# Altium PCB PCB_Testplatine - GND mit Tracks.PcbDoc (part 3 of 4)
Units mm, origin at the board's own origin, x right, y up, seen from the top; angles counter-clockwise.
Board outline 124.77 x 137.35 mm, 2 copper layers (Top Layer, Bottom Layer); 214 components, 181 nets, 1100 pads, 464 vias.
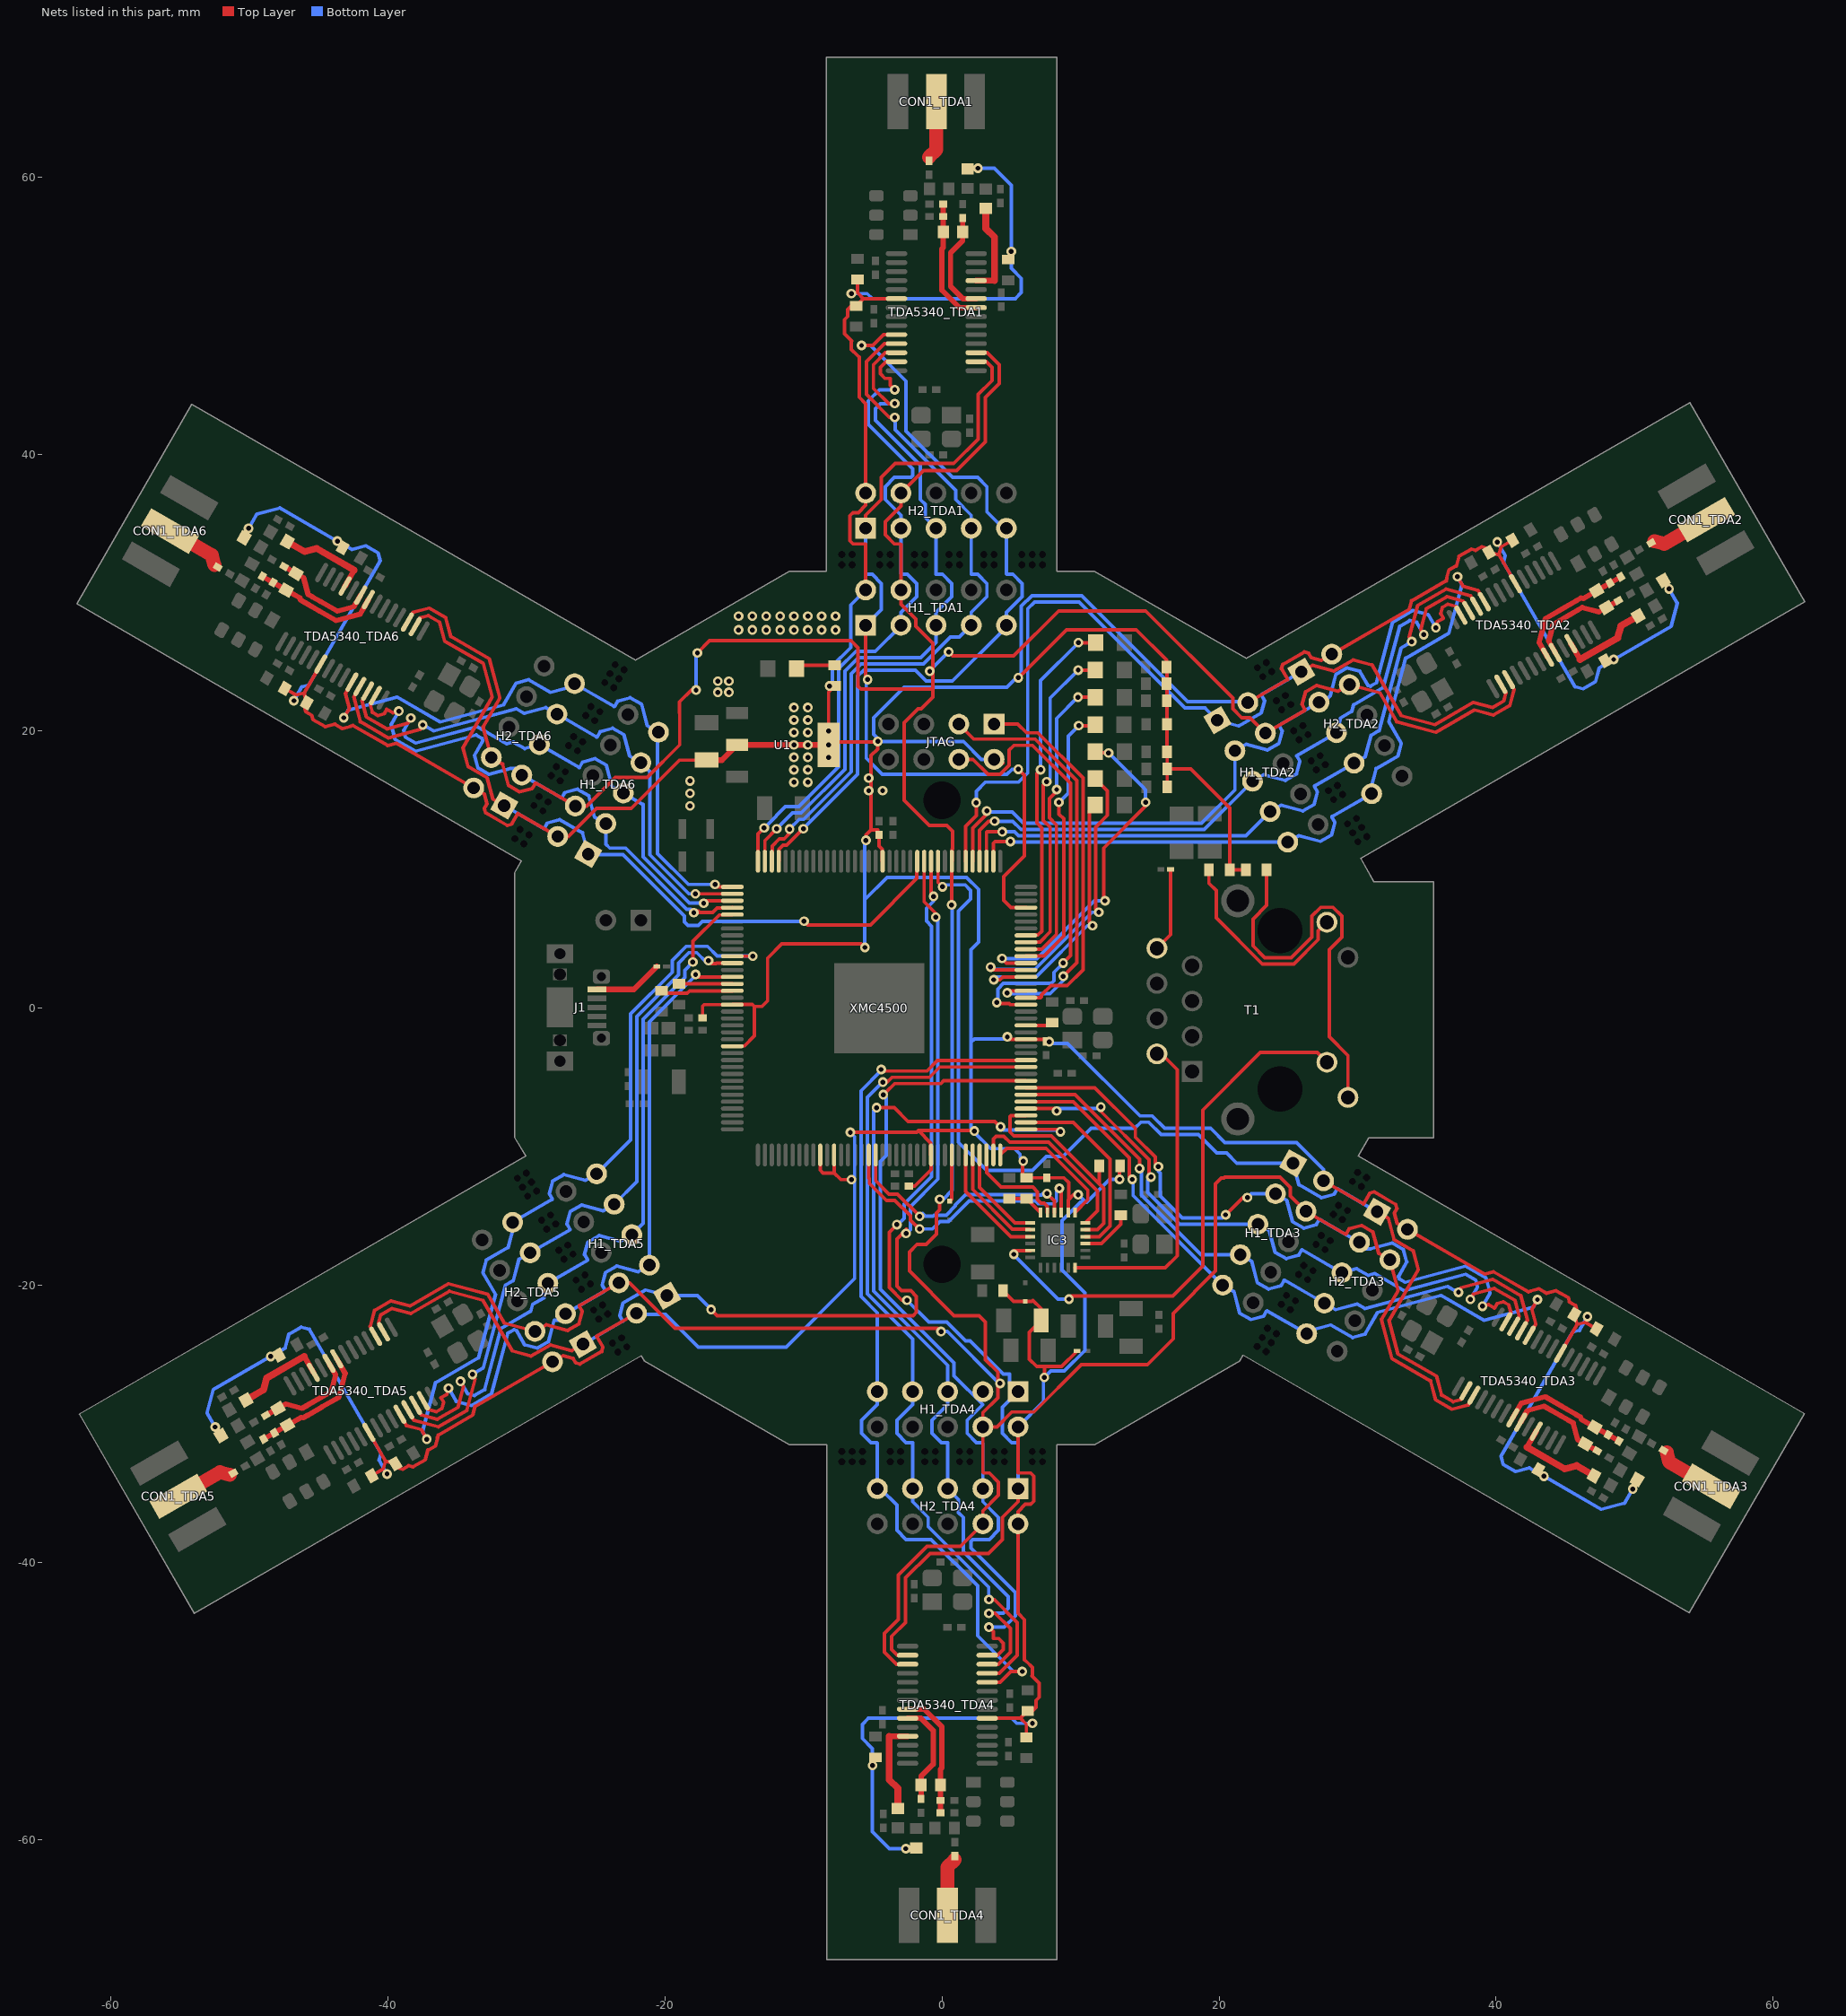
[diagram p3: the nets of this part, all layers, seen from the top]

## Via types
v1: diameter 0.7, hole 0.35, Top Layer to Bottom Layer, 410 vias
v2: diameter 0.5, hole 0.2, Top Layer to Bottom Layer, 36 vias
v3: diameter 2.7, hole 2.5, Top Layer to Bottom Layer, 12 vias
v4: diameter 1.27, hole 0.711, Top Layer to Bottom Layer, 6 vias

## Nets (pads, with @x,y where several pads share a name; then routed paths per layer and width w, separated by ;. In a path a pad name is that pad's centre, name@x,y a point inside that pad or via, vN(x,y) a via of type N, cw(c..) or ccw(c..) an arc to the next point about the centre after c; other vN are vias at no path point) (continued)
NetIC3_6: IC3.6 T1.2 | length 23.1
  Top Layer w0.254: IC3.6@9.6,-18.75 16.112,-18.75 16.977,-17.885 16.977,-5.459 16.973,-5.455 16.973,-4.443 15.83,-3.3 T1.2@15.51,-3.3
NetIC3_9: IC3.9 R205.2 | length 3.8
  Top Layer w0.254: IC3.9@10.35,-17 11.496,-17 12.9,-15.595 R205.2@12.9,-14.95
NetIC3_10: IC3.10 XMC4500.74 | length 14.1
  Top Layer w0.254: XMC4500.74@6.05,-8.25 9.462,-8.25 12.123,-10.911 12.123,-15.73 11.353,-16.5 IC3.10@10.35,-16.5
NetIC3_11: IC3.11 R204.1 XMC4500.75 | length 16.1
  Top Layer w0.254: XMC4500.75@6.05,-7.75 6.027,-7.773 4.96,-7.773 4.898,-7.835 4.898,-8.948 5.177,-9.227 7.881,-9.227 11.35,-12.696 ; IC3.11@10.35,-16 11.211,-16 11.669,-15.542 11.669,-13.015 11.35,-12.696 ; R204.1@11.35,-11.4 11.35,-12.696
NetIC3_12: IC3.12 XMC4500.71 | length 13
  Top Layer w0.254: XMC4500.71@3.7,-10.6 3.7,-9.45 3.9,-9.25 4.45,-9.25 4.881,-9.681 7.693,-9.681 11.215,-13.203 11.215,-14.635 IC3.12@10.35,-15.5
NetIC3_13: IC3.13 XMC4500.72 | length 9.7
  Top Layer w0.254: XMC4500.72@4.2,-10.6 4.665,-10.135 7.505,-10.135 10.52,-13.15 10.52,-13.83 IC3.13@9.6,-14.75
NetIC3_15: IC3.15 XMC4500.53 | length 21.1
  Top Layer w0.254: XMC4500.53@-5.3,-10.6 -5.3,-12.26 -5.254,-12.306 -5.254,-12.65 -4.023,-13.881 -3.411,-13.881 -2.297,-14.995 -2.297,-15.31 -1.9,-15.707 -1.853,-15.707 v1(-1.62,-15.94) v1@-1.55,-15.94 ; v1(8.46,-13.01) 8.438,-13.01 8.378,-13.07 8.6,-13.292 IC3.15@8.6,-14.75
  Bottom Layer w0.254: v1(-1.62,-15.94) -0.711,-15.94 -0.166,-15.395 0.477,-15.395 1.941,-13.93 6.739,-13.93 6.937,-14.128 8.027,-14.128 8.25,-13.905 8.25,-13.22 v1(8.46,-13.01)
NetIC3_16: IC3.16 XMC4500.54 | length 17.8
  Top Layer w0.254: XMC4500.54@-4.8,-10.6 -4.8,-12.462 -3.835,-13.427 -3.223,-13.427 v1(-1.62,-15.03) ; v1(7.573,-13.396) 8.1,-13.923 IC3.16@8.1,-14.75
  Bottom Layer w0.254: v1(-1.62,-15.03) -1.419,-14.829 -1.22,-15.027 -0.66,-15.027 -0.574,-14.941 0.288,-14.941 0.951,-14.278 0.951,-14.215 1.69,-13.476 6.927,-13.476 6.934,-13.483 7.171,-13.483 7.258,-13.396 v1(7.573,-13.396)
NetIC3_17: IC3.17 XMC4500.70 | length 7.4
  Top Layer w0.254: XMC4500.70@3.223,-10.623 3.223,-11.885 4.265,-12.927 6.539,-12.927 6.877,-13.265 6.877,-13.807 7.143,-14.073 7.36,-14.073 7.6,-14.313 IC3.17@7.6,-14.75
NetIC3_18: IC3.18 R203.1 R206.1 | length 2.7
  Top Layer w0.254: R206.1@4.85,-13.75 R203.1@6.1,-13.75 IC3.18@7.1,-14.75
NetIC3_19: IC3.19 XMC4500.69 | length 7.1
  Top Layer w0.254: XMC4500.69@2.7,-10.6 2.7,-12.95 5.25,-15.5 IC3.19@6.35,-15.5
NetIC3_20: IC3.20 XMC4500.68 | length 7.8
  Top Layer w0.254: XMC4500.68@2.2,-10.6 2.2,-13.092 5.062,-15.954 6.304,-15.954 IC3.20@6.35,-16
NetIC3_21: IC3.21 XMC4500.67 | length 8.6
  Top Layer w0.254: XMC4500.67@1.7,-10.6 1.7,-13.234 4.966,-16.5 IC3.21@6.35,-16.5
NetIC3_23: IC3.23 T1.10 | length 39.8
  Top Layer w0.254: v1(5.18,-17.77) 5.18,-17.53 5.15,-17.5 IC3.23@6.35,-17.5 ; v1(9.163,-21.012) 9.163,-20.963 9.338,-20.789 16.642,-20.789 18.83,-18.601 18.83,-7.36 22.98,-3.21 27.08,-3.21 T1.10@27.78,-3.91
  Bottom Layer w0.254: v1(5.18,-17.77) 5.18,-17.83 8.362,-21.012 v1(9.163,-21.012) ; T1.10@27.78,-3.91 T1.10@27.78,-3.888
NetJ1_1: J1.1 L11.2 | length 5
  Top Layer w0.4: J1.1@-24.925,1.35 -22.25,1.35 L11.2@-20.6,3
NetJTAG_4: JTAG.4 XMC4500.91 | length 33.4
  Top Layer w0.254: JTAG.4@1.21,17.96 2.227,17.96 3.304,16.883 4.196,16.883 4.827,17.514 4.827,18.615 5.181,18.969 6.531,18.969 9.265,16.235 9.265,3.799 8.743,3.277 v1(8.743,3.25) ; v1(3.95,0.4) 4.023,0.327 4.83,0.327 4.907,0.25 XMC4500.91@6.05,0.25
  Bottom Layer w0.254: v1(3.95,0.4) 4.023,0.473 4.023,1.38 4.42,1.777 7.885,1.777 8.073,1.965 8.073,2.58 v1(8.743,3.25)
NetL3_TDA1_1: L3_TDA1.1 TDA5340_TDA1.25 | length 6.8
  Top Layer w0.4: TDA5340_TDA1.25@2.455,52.515 3.78,52.515
  Top Layer w0.5: L3_TDA1.1@3.15,57.73 3.15,56.28 3.78,55.65 3.78,52.515
NetL3_TDA2_1: L3_TDA2.1 TDA5340_TDA2.25 | length 6.8
  Top Layer w0.4: TDA5340_TDA2.25@45.4,26.31 46.063,25.162
  Top Layer w0.5: 46.063,25.162 48.778,26.73 49.008,27.59 L3_TDA2.1@50.264,28.315
NetL3_TDA3_1: L3_TDA3.1 TDA5340_TDA3.25 | length 6.8
  Top Layer w0.4: 42.232,-31.693 TDA5340_TDA3.25@42.895,-30.545
  Top Layer w0.5: 42.232,-31.693 44.947,-33.26 45.808,-33.03 L3_TDA3.1@47.064,-33.755
NetL3_TDA4_1: L3_TDA4.1 TDA5340_TDA4.25 | length 6.8
  Top Layer w0.4: -3.82,-52.565 TDA5340_TDA4.25@-2.495,-52.565
  Top Layer w0.5: -3.82,-52.565 -3.82,-55.7 -3.19,-56.33 L3_TDA4.1@-3.19,-57.78
NetL3_TDA5_1: L3_TDA5.1 TDA5340_TDA5.25 | length 6.8
  Top Layer w0.4: -46.062,-25.143 TDA5340_TDA5.25@-45.4,-26.291
  Top Layer w0.5: L3_TDA5.1@-50.264,-28.297 -49.008,-27.572 -48.777,-26.711 -46.062,-25.143
NetL3_TDA6_1: L3_TDA6.1 TDA5340_TDA6.25 | length 6.8
  Top Layer w0.4: TDA5340_TDA6.25@-43.115,30.465 -42.452,31.613
  Top Layer w0.5: L3_TDA6.1@-47.284,33.675 -46.028,32.95 -45.167,33.18 -42.452,31.613
NetL201_2: L201.2 T1.8 | length 6.3
  Top Layer w0.254: T1.8@15.65,4.46 T1.8@15.51,4.32 16.49,5.3 L201.2@16.49,10.01
NetPower_1: Power.1 R11.1 | length 2.9
  Top Layer w0.254: Power.1@-10.51,24.51 -10.27,24.75 R11.1@-7.75,24.75
NetR10_1: R10.1 XMC4500.88 | length 2
  Top Layer w0.254: XMC4500.88@6.05,-1.25 7.75,-1.25 R10.1@7.95,-1.05
NetR12_1: R12.1 XMC4500.15 | length 3.9
  Top Layer w0.254: R12.1@-19,1.75 XMC4500.15@-15.15,1.75
NetR13_1: R13.1 XMC4500.16 | length 5.4
  Top Layer w0.254: R13.1@-20.25,1.25 -20.25,1.073 -18.415,1.073 -18.238,1.25 XMC4500.16@-15.15,1.25
NetR200_1: R200.1 T1.9 | length 29.4
  Top Layer w0.254: R200.1@23.43,9.99 23.43,7.41 22.448,6.428 22.448,4.492 23.302,3.638 25.209,3.638 26.703,5.132 26.703,6.646 27.334,7.277 28.226,7.277 28.857,6.646 28.857,5.123 27.95,4.216 27.95,-2.075 29.3,-3.425 T1.9@29.3,-6.45
NetR201_1: R201.1 T1.12 | length 14.7
  Top Layer w0.254: R201.1@19.26,9.99 19.26,9.011 19.79,8.481 19.79,6.508 23.114,3.184 25.397,3.184 27.157,4.944 27.157,5.577 T1.12@27.78,6.2
P_ON1: H1_TDA1.3 H2_TDA1.3 TDA5340_TDA1.13 XMC4500.144 | length 49.3
  Top Layer w0.254: XMC4500.144@-13.3,10.6 -13.3,12.56 v1(-12.85,13.01) ; v1(-3.42,44.64) -3.739,44.959 -3.739,45.459 -4.125,45.459 -4.451,45.785 -4.451,46.245 -4.031,46.665 TDA5340_TDA1.13@-3.295,46.665
  Bottom Layer w0.254: v1(-12.85,13.01) -12.674,13.01 -12.624,13.06 -12.624,13.23 -11.32,14.535 -10.361,14.535 -7.462,17.434 -7.462,24.522 -6.225,25.759 -4.831,25.759 -2.98,27.61 -2.98,28.581 -1.849,29.712 -1.849,30.648 -2.512,31.311 -2.891,31.311 -2.98,31.4 H2_TDA1.3@-2.98,34.64 -2.98,35.581 -4.111,36.712 -4.111,37.648 -3.448,38.311 -2.249,38.311 -2.12,38.44 -2.12,38.94 -5.32,42.14 -5.32,43.84 -4.52,44.64 v1@-3.42,44.64
P_ON2: H1_TDA2.3 H2_TDA2.3 TDA5340_TDA2.13 XMC4500.113 | length 52.8
  Top Layer w0.254: XMC4500.113@2.177,10.623 XMC4500.113@2.2,10.6 2.2,12.99 3.22,14.01 v1(3.22,14.23) ; v1(35.643,27.46) 35.759,27.896 36.193,28.146 35.999,28.48 36.119,28.925 36.517,29.156 37.091,29.002 TDA5340_TDA2.13@37.459,28.364
  Bottom Layer w0.254: v1(3.22,14.23) 3.283,14.167 5.057,14.167 5.882,13.342 18.731,13.342 21.14,15.751 H1_TDA2.3@21.14,18.579 21.955,19.049 23.5,18.635 24.311,19.104 24.554,20.009 24.364,20.338 24.397,20.459 H2_TDA2.3@27.202,22.079 27.547,22.079 28.017,22.549 28.431,24.094 29.242,24.563 30.147,24.32 30.747,23.282 30.923,23.234 31.356,23.484 32.528,27.856 34,28.706 35.093,28.413 v1(35.643,27.46)
P_ON3: H1_TDA3.3 H2_TDA3.3 TDA5340_TDA3.13 XMC4500.79 | length 51
  Top Layer w0.254: XMC4500.79@6.05,-5.75 11.027,-5.75 13.953,-8.676 13.953,-9.314 15.381,-10.742 15.381,-11.211 v1(15.61,-11.44) ; v1(20.47,-14.92) 21.71,-13.68 v1(22.04,-13.68) ; v1(39.012,-21.52) 39.448,-21.403 39.881,-21.653 40.074,-21.319 40.519,-21.199 40.918,-21.43 41.072,-22.003 TDA5340_TDA3.13@40.704,-22.641
  Bottom Layer w0.254: v1(15.61,-11.44) 15.61,-11.775 15.751,-11.916 15.751,-13.565 17.333,-15.147 20.243,-15.147 v1(20.47,-14.92) ; v1(22.04,-13.68) 22.319,-13.401 H1_TDA3.3@24.07,-13.401 24.885,-13.871 25.298,-15.416 26.11,-15.885 27.015,-15.642 27.205,-15.313 27.326,-15.281 H2_TDA3.3@30.132,-16.901 30.602,-17.371 30.947,-17.371 32.492,-16.957 33.303,-17.426 33.546,-18.331 32.946,-19.369 32.993,-19.546 33.426,-19.796 37.797,-18.624 39.27,-19.474 39.562,-20.567 v1(39.012,-21.52)
P_ON4: H1_TDA4.3 H2_TDA4.3 TDA5340_TDA4.13 XMC4500.80 | length 62
  Top Layer w0.254: v1(-4.25,-6.25) -4.017,-6.017 -4,-6.017 -3.433,-5.45 -0.084,-5.45 0.116,-5.25 XMC4500.80@6.05,-5.25 ; TDA5340_TDA4.13@3.255,-46.715 3.991,-46.715 4.411,-46.295 4.411,-45.835 4.085,-45.509 3.699,-45.509 3.699,-45.009 v1(3.38,-44.69)
  Bottom Layer w0.254: v1(-4.25,-6.25) -4.04,-6.46 -4.04,-7.983 -4.047,-7.99 -4.047,-8.55 -4.04,-8.557 -4.04,-10.646 -4.45,-11.056 -4.45,-20.3 0.85,-25.6 0.85,-26.541 2.94,-28.631 1.809,-29.762 1.809,-30.698 2.472,-31.361 2.851,-31.361 2.94,-31.45 2.94,-35.631 4.071,-36.762 4.071,-37.698 3.408,-38.361 2.209,-38.361 2.08,-38.49 2.08,-38.99 5.28,-42.19 5.28,-43.89 4.48,-44.69 v1(3.38,-44.69)
P_ON5: H1_TDA5.3 H2_TDA5.3 TDA5340_TDA5.13 XMC4500.14 | length 51.7
  Top Layer w0.254: TDA5340_TDA5.13@-37.459,-28.346 -37.09,-28.983 -36.517,-29.137 -36.118,-28.907 -35.999,-28.462 -36.192,-28.127 -35.759,-27.877 v1(-35.642,-27.441) ; v1(-17.8,2.43) -17.8,2.296 -17.754,2.25 XMC4500.14@-15.15,2.25
  Bottom Layer w0.254: v1(-35.642,-27.441) -35.092,-28.394 -34,-28.687 -32.527,-27.837 -31.356,-23.466 -30.923,-23.216 -30.747,-23.263 -30.147,-24.302 -29.242,-24.544 -28.431,-24.076 -28.017,-22.531 -27.672,-22.531 H2_TDA5.3@-27.202,-22.06 -24.396,-20.44 -24.364,-20.319 -24.553,-19.99 -24.311,-19.085 -23.499,-18.617 -21.955,-19.031 H1_TDA5.3@-21.14,-18.56 -21.14,-0.986 -17.8,2.354 v1(-17.8,2.43)
P_ON6: H1_TDA6.3 H2_TDA6.3 TDA5340_TDA6.13 XMC4500.4 | length 39.5
  Top Layer w0.254: TDA5340_TDA6.13@-40.924,22.561 -41.292,21.923 -41.138,21.35 -40.739,21.119 -40.294,21.239 -40.101,21.573 -39.668,21.323 v1(-39.232,21.44) ; v1(-17.93,6.89) -17.93,7 -17.607,7 -17.5,6.893 -16.574,6.893 -16.24,7.227 -15.173,7.227 XMC4500.4@-15.15,7.25
  Bottom Layer w0.254: v1(-39.232,21.44) -39.782,20.487 -39.49,19.394 -38.017,18.544 -33.646,19.716 -33.213,19.466 -33.166,19.289 -33.766,18.251 -33.523,17.346 -32.712,16.877 -31.167,17.291 -30.822,17.291 H2_TDA6.3@-30.352,16.821 -27.546,15.201 -27.425,15.233 -27.235,15.562 -26.33,15.805 -25.518,15.336 -25.105,13.791 H1_TDA6.3@-24.29,13.321 -24.29,11.84 -24,11.55 -22.866,11.55 -18.435,7.119 -18.159,7.119 v1(-17.93,6.89)
PP0_TDA1: H1_TDA1.9 H2_TDA1.9 TDA5340_TDA1.10 XMC4500.141 | length 58.8
  Top Layer w0.254: XMC4500.141@-11.8,10.6 -11.777,10.623 -11.777,11.473 -11.498,11.752 -11.218,11.752 v1(-10.02,12.95) ; v1(-5.82,47.84) -5.012,47.84 -4.237,48.615 TDA5340_TDA1.10@-3.295,48.615
  Bottom Layer w0.254: v1(-10.02,12.95) -6.1,16.87 -6.1,23.957 -5.66,24.397 -1.934,24.397 -1.15,23.613 0.74,23.613 4.64,27.513 H1_TDA1.9@4.64,27.64 4.64,28.582 5.771,29.713 5.771,30.648 5.108,31.311 4.68,31.311 4.64,31.351 H2_TDA1.9@4.64,34.64 ; v1(-5.82,47.84) -5.183,47.84 -2.604,45.261 -2.604,41.662 0.747,38.311 2.568,38.311 3.231,37.648 3.231,35.827 H2_TDA1.9@4.418,34.64
PP0_TDA2: H1_TDA2.9 H2_TDA2.9 TDA5340_TDA2.10 XMC4500.110 | length 52.5
  Top Layer w0.254: XMC4500.110@3.7,10.6 3.7,11.91 3.82,12.03 v1(4.93,12.03) ; v1(37.214,31.139) 37.618,30.439 38.677,30.155 TDA5340_TDA2.10@39.148,29.339
  Bottom Layer w0.254: v1(4.93,12.03) 4.98,11.98 H1_TDA2.9@24.95,11.98 25.765,12.45 27.31,12.036 28.121,12.505 28.364,13.41 28.149,13.781 28.164,13.836 H2_TDA2.9@31.012,15.48 ; H2_TDA2.9@30.901,15.672 31.336,17.294 32.913,18.204 33.156,19.109 32.245,20.687 33.472,25.264 36.588,27.064 37.532,30.587 v1(37.214,31.139)
PP0_TDA3: H1_TDA3.9 H2_TDA3.9 TDA5340_TDA3.10 XMC4500.77 | length 51
  Top Layer w0.254: XMC4500.77@6.05,-6.75 9.462,-6.75 13.527,-10.815 13.527,-12.167 v1(13.72,-12.36) ; TDA5340_TDA3.10@42.392,-23.616 42.863,-22.8 42.579,-21.741 v1(42.984,-21.041)
  Bottom Layer w0.254: v1(13.72,-12.36) 13.79,-12.43 13.79,-13.53 H1_TDA3.9@20.26,-20 21.075,-20.47 21.488,-22.015 22.3,-22.484 23.205,-22.241 23.419,-21.87 23.474,-21.855 H2_TDA3.9@26.322,-23.5 ; H2_TDA3.9@26.433,-23.308 28.055,-22.873 29.632,-23.784 30.537,-23.542 31.448,-21.964 36.025,-20.737 39.142,-22.537 42.665,-21.593 v1(42.984,-21.041)
PP0_TDA4: H1_TDA4.9 H2_TDA4.9 TDA5340_TDA4.10 XMC4500.83 | length 65.1
  Top Layer w0.254: v1(-4.4,-4.43) -4.29,-4.54 -1.1,-4.54 -0.333,-3.773 6.027,-3.773 XMC4500.83@6.05,-3.75 ; TDA5340_TDA4.10@3.255,-48.665 4.197,-48.665 4.972,-47.89 v1(5.78,-47.89)
  Bottom Layer w0.254: H2_TDA4.9@-4.68,-34.69 -4.68,-31.401 -4.72,-31.361 -5.148,-31.361 -5.811,-30.698 -5.811,-29.762 -4.68,-28.631 H1_TDA4.9@-4.68,-27.69 -4.68,-21.996 -5.865,-20.811 -5.865,-5.968 -4.4,-4.503 v1(-4.4,-4.43) ; H2_TDA4.9@-4.458,-34.69 -3.271,-35.877 -3.271,-37.698 -2.608,-38.361 -0.787,-38.361 2.564,-41.712 2.564,-45.311 5.143,-47.89 v1(5.78,-47.89)
PP0_TDA5: H1_TDA5.9 H2_TDA5.9 TDA5340_TDA5.10 XMC4500.11 | length 55.6
  Top Layer w0.254: TDA5340_TDA5.10@-39.147,-29.321 -38.677,-30.136 -37.618,-30.42 v1(-37.214,-31.12) ; XMC4500.11@-15.15,3.75 v1(-13.67,3.75)
  Bottom Layer w0.254: v1(-37.214,-31.12) -37.532,-30.568 -36.588,-27.045 -33.471,-25.246 -32.245,-20.668 -33.156,-19.091 -32.913,-18.186 -31.336,-17.275 H2_TDA5.9@-30.901,-15.654 ; H2_TDA5.9@-31.012,-15.461 -28.164,-13.817 -28.149,-13.762 -28.363,-13.391 -28.121,-12.486 -27.309,-12.017 -25.765,-12.431 H1_TDA5.9@-24.95,-11.961 -22.502,-9.513 -22.502,-0.422 -19.498,2.582 -19.498,3.431 -18.468,4.461 -16.944,4.461 -16.253,3.77 -13.69,3.77 v1(-13.67,3.75)
PP0_TDA6: H1_TDA6.9 H2_TDA6.9 TDA5340_TDA6.10 XMC4500.1 | length 45.1
  Top Layer w0.254: v1(-43.204,20.961) -42.799,21.661 -43.083,22.72 TDA5340_TDA6.10@-42.612,23.536 ; v1(-16.4,8.93) -16.22,8.75 XMC4500.1@-15.15,8.75
  Bottom Layer w0.254: v1(-43.204,20.961) -42.885,21.513 -39.362,22.457 -36.245,20.657 -31.668,21.884 -30.757,23.461 -29.852,23.704 -28.275,22.793 H2_TDA6.9@-26.653,23.228 ; H2_TDA6.9@-26.542,23.42 -23.694,21.775 -23.639,21.79 -23.425,22.161 -22.52,22.404 -21.708,21.935 -21.295,20.39 H1_TDA6.9@-20.48,19.92 -20.567,19.833 -20.567,11.43 -20.546,11.408 -20.546,11.156 -18.32,8.93 v1(-16.4,8.93)
PP1_TDA1: H1_TDA1.7 H2_TDA1.7 TDA5340_TDA1.11 XMC4500.142 | length 53
  Top Layer w0.254: XMC4500.142@-12.3,10.6 -12.277,10.623 -12.277,11.69 -11.761,12.206 -11.406,12.206 -11.02,12.592 v1(-11.02,12.92) ; v1(-3.42,42.64) -3.802,42.64 -5.467,44.305 -5.467,46.666 -4.168,47.965 TDA5340_TDA1.11@-3.295,47.965
  Bottom Layer w0.254: v1(-11.02,12.92) -10.313,13.627 -9.985,13.627 -6.554,17.058 -6.554,24.145 -5.848,24.851 -1.346,24.851 0.59,26.787 1.247,26.787 H1_TDA1.7@2.1,27.64 2.1,28.581 3.231,29.712 3.231,30.648 2.568,31.311 2.12,31.311 2.1,31.331 H2_TDA1.7@2.1,34.64 2.1,35.581 0.969,36.712 0.969,37.37 -3.401,41.74 v1@-3.401,42.62 ; v1@-3.42,42.321 v1(-3.42,42.64)
PP1_TDA2: H1_TDA2.7 H2_TDA2.7 TDA5340_TDA2.11 XMC4500.111 | length 50
  Top Layer w0.254: XMC4500.111@3.2,10.6 3.2,12.69 3.24,12.73 v1(4.34,12.73) ; v1(33.911,26.46) 33.72,26.791 34.329,29.066 36.374,30.246 38.148,29.771 TDA5340_TDA2.11@38.585,29.014
  Bottom Layer w0.254: v1(4.34,12.73) 5.21,12.73 5.506,12.434 21.935,12.434 H1_TDA2.7@23.68,14.18 24.495,14.65 26.04,14.236 26.851,14.704 27.094,15.609 26.869,15.998 26.877,16.025 H2_TDA2.7@29.742,17.68 30.557,18.15 30.971,19.695 31.542,20.024 33.141,25.993 v1@33.904,26.434 ; v1@33.634,26.3 v1(33.911,26.46)
PP1_TDA3: H1_TDA3.7 H2_TDA3.7 TDA5340_TDA3.11 XMC4500.78 | length 48.3
  Top Layer w0.254: XMC4500.78@6.05,-6.25 9.605,-6.25 14.25,-10.895 v1(14.25,-11.58) ; v1(37.28,-20.52) 37.471,-20.189 39.746,-19.58 41.791,-20.76 42.266,-22.534 TDA5340_TDA3.11@41.829,-23.291
  Bottom Layer w0.254: v1(14.25,-11.58) 14.397,-11.727 14.397,-13.495 18.702,-17.8 H1_TDA3.7@21.53,-17.8 22.345,-18.271 22.758,-19.816 23.57,-20.284 24.475,-20.042 24.699,-19.653 24.726,-19.646 H2_TDA3.7@27.592,-21.3 28.407,-21.771 29.952,-21.357 30.522,-21.686 36.491,-20.087 v1@37.254,-20.527 ; v1@37.004,-20.36 v1(37.28,-20.52)
PP1_TDA4: H1_TDA4.7 H2_TDA4.7 TDA5340_TDA4.11 XMC4500.82 | length 61.6
  Top Layer w0.254: v1(-4.28,-5.34) -3.965,-5.34 -3.621,-4.996 -3.615,-4.996 -3.613,-4.994 -0.912,-4.994 -0.168,-4.25 XMC4500.82@6.05,-4.25 ; TDA5340_TDA4.11@3.255,-48.015 4.128,-48.015 5.427,-46.716 5.427,-44.355 3.762,-42.69 v1(3.38,-42.69)
  Bottom Layer w0.254: v1(-4.28,-5.34) -4.307,-5.34 -5.411,-6.444 -5.411,-20.623 -2.14,-23.894 -2.14,-28.631 -3.271,-29.762 -3.271,-30.698 -2.608,-31.361 -2.16,-31.361 -2.14,-31.381 -2.14,-35.631 -1.009,-36.762 -1.009,-37.42 3.361,-41.79 v1@3.361,-42.67 ; v1(3.38,-42.69) v1@3.38,-42.371
PP1_TDA5: H1_TDA5.7 H2_TDA5.7 TDA5340_TDA5.11 XMC4500.12 | length 50.6
  Top Layer w0.254: TDA5340_TDA5.11@-38.584,-28.996 -38.148,-29.752 -36.374,-30.227 -34.329,-29.047 -33.72,-26.772 v1(-33.91,-26.441) ; v1(-16.87,3.43) -16.644,3.204 -16.336,3.204 -16.29,3.25 XMC4500.12@-15.15,3.25
  Bottom Layer w0.254: v1(-33.91,-26.441) v1@-33.634,-26.282 ; v1@-33.903,-26.415 -33.141,-25.974 -31.541,-20.006 -30.971,-19.676 -30.557,-18.131 H2_TDA5.7@-29.742,-17.661 -26.876,-16.006 -26.869,-15.979 -27.093,-15.591 -26.851,-14.686 -26.039,-14.217 -24.495,-14.631 H1_TDA5.7@-23.68,-14.161 -22.048,-12.529 -22.048,-0.61 -19.044,2.394 -19.044,3.243 -18.28,4.007 -17.72,4.007 -17.034,3.321 -16.979,3.321 v1(-16.87,3.43)
PP1_TDA6: H1_TDA6.7 H2_TDA6.7 TDA5340_TDA6.11 XMC4500.2 | length 40.6
  Top Layer w0.254: TDA5340_TDA6.11@-42.049,23.211 -42.486,22.454 -42.011,20.68 -39.966,19.5 -37.691,20.109 v1(-37.5,20.44) ; v1(-17.82,8.25) XMC4500.2@-15.15,8.25
  Bottom Layer w0.254: v1(-37.5,20.44) v1@-37.224,20.28 ; v1@-37.474,20.447 -36.711,20.007 -30.742,21.606 -30.172,21.277 -28.627,21.691 H2_TDA6.7@-27.812,21.22 -24.946,19.566 -24.919,19.573 -24.695,19.962 -23.79,20.204 -22.978,19.736 -22.565,18.191 H1_TDA6.7@-21.75,17.72 -21.1,17.07 -21.1,11.067 -18.282,8.25 v1(-17.82,8.25)
PP2_TDA1: H1_TDA1.5 H2_TDA1.5 TDA5340_TDA1.12 XMC4500.143 | length 51.1
  Top Layer w0.254: XMC4500.143@-12.8,10.6 -12.8,12.097 v1(-11.947,12.95) ; v1(-3.42,43.64) -3.857,43.64 -4.959,44.742 -4.959,46.456 -4.1,47.315 TDA5340_TDA1.12@-3.295,47.315
  Bottom Layer w0.254: v1(-11.947,12.95) -10.816,14.081 -10.173,14.081 -7.008,17.246 -7.008,24.333 -6.037,25.305 -1.535,25.305 -0.44,26.399 H1_TDA1.5@-0.44,27.64 -0.44,28.581 0.691,29.712 0.691,30.648 0.028,31.311 -0.42,31.311 -0.44,31.331 H2_TDA1.5@-0.44,34.64 -1.22,35.42 -1.22,36.361 -1.571,36.712 -1.571,39.191 -4.812,42.432 -4.812,43.274 -4.446,43.64 v1(-3.42,43.64)
PP2_TDA2: H1_TDA2.5 H2_TDA2.5 TDA5340_TDA2.12 XMC4500.112 | length 49.8
  Top Layer w0.254: XMC4500.112@2.7,10.6 2.7,12.832 3.358,13.49 v1(3.79,13.49) ; v1(34.777,26.96) 34.558,27.338 34.962,28.844 36.446,29.701 37.619,29.386 TDA5340_TDA2.12@38.022,28.689
  Bottom Layer w0.254: v1(3.79,13.49) 5.092,13.49 5.694,12.888 18.919,12.888 H1_TDA2.5@22.41,16.379 23.225,16.85 24.77,16.436 25.581,16.904 25.824,17.809 25.599,18.198 25.607,18.225 H2_TDA2.5@28.472,19.879 28.758,20.945 29.572,21.415 29.701,21.895 31.848,23.134 33.035,27.562 33.764,27.983 34.264,27.849 v1(34.777,26.96)
PP2_TDA3: H1_TDA3.5 H2_TDA3.5 TDA5340_TDA3.12 XMC4500.76 | length 48.4
  Top Layer w0.254: XMC4500.76@6.05,-7.25 6.06,-7.26 8.27,-7.26 v1(8.27,-7.43) ; v1(11.46,-7.14) 11.358,-7.242 11.358,-7.362 14.927,-10.93 14.927,-12.049 v1(15.074,-12.196) ; v1(38.146,-21.02) 38.365,-20.641 39.87,-20.238 41.354,-21.095 41.669,-22.269 TDA5340_TDA3.12@41.267,-22.966
  Bottom Layer w0.254: v1(8.27,-7.43) 8.27,-7.39 8.42,-7.24 11.36,-7.24 v1(11.46,-7.14) ; v1(15.074,-12.196) 14.851,-12.419 14.851,-13.307 17.145,-15.601 H1_TDA3.5@22.8,-15.601 23.615,-16.071 24.028,-17.616 24.84,-18.084 25.745,-17.842 25.969,-17.453 25.997,-17.446 H2_TDA3.5@28.862,-19.101 29.928,-18.815 30.742,-19.285 31.222,-19.157 33.369,-20.397 37.796,-19.21 38.526,-19.631 38.659,-20.131 v1(38.146,-21.02)
PP2_TDA4: H1_TDA4.5 H2_TDA4.5 TDA5340_TDA4.12 XMC4500.73 | length 65.3
  Top Layer w0.254: v1(-4.73,-7.19) -3.46,-7.19 -2.47,-8.18 3.79,-8.18 4.18,-8.57 v1(4.22,-8.57) ; TDA5340_TDA4.12@3.255,-47.365 4.06,-47.365 4.919,-46.506 4.919,-44.792 3.817,-43.69 v1(3.38,-43.69) ; XMC4500.73@6.05,-8.75 8.45,-8.75 8.538,-8.838 v1(8.538,-8.927)
  Bottom Layer w0.254: v1(-4.73,-7.19) -4.957,-7.417 -4.957,-20.435 0.396,-25.788 0.396,-27.686 H1_TDA4.5@0.4,-27.69 0.4,-28.631 -0.731,-29.762 -0.731,-30.698 -0.068,-31.361 0.38,-31.361 0.4,-31.381 H2_TDA4.5@0.4,-34.69 1.18,-35.47 1.18,-36.411 1.531,-36.762 1.531,-39.241 4.772,-42.482 4.772,-43.324 4.406,-43.69 v1(3.38,-43.69) ; v1(4.22,-8.57) 4.22,-8.6 4.42,-8.8 8.411,-8.8 v1(8.538,-8.927)
PP2_TDA5: H1_TDA5.5 H2_TDA5.5 TDA5340_TDA5.12 XMC4500.5 | length 52.5
  Top Layer w0.254: TDA5340_TDA5.12@-38.022,-28.671 -37.619,-29.367 -36.445,-29.682 -34.961,-28.825 -34.558,-27.32 v1(-34.776,-26.941) ; v1(-18,3.33) -18,4.825 -16.098,6.727 XMC4500.5@-15.173,6.727
  Bottom Layer w0.254: v1(-34.776,-26.941) -34.263,-27.83 -33.764,-27.964 -33.034,-27.543 -31.848,-23.116 -29.701,-21.876 -29.572,-21.396 -28.758,-20.926 H2_TDA5.5@-28.472,-19.861 -25.607,-18.206 -25.599,-18.179 -25.823,-17.79 -25.581,-16.885 -24.769,-16.417 -23.225,-16.831 H1_TDA5.5@-22.41,-16.361 -21.594,-15.545 -21.594,-0.798 -18.59,2.206 -18.59,2.74 v1(-18,3.33)
PP2_TDA6: H1_TDA6.5 H2_TDA6.5 TDA5340_TDA6.12 XMC4500.3 | length 39.3
  Top Layer w0.254: TDA5340_TDA6.12@-41.487,22.886 -41.889,22.189 -41.574,21.015 -40.09,20.158 -38.585,20.561 v1(-38.366,20.94) ; v1(-17.22,7.57) -17.04,7.75 XMC4500.3@-15.15,7.75
  Bottom Layer w0.254: v1(-38.366,20.94) -38.879,20.051 -38.746,19.551 -38.016,19.13 -33.589,20.317 -31.442,19.077 -30.962,19.205 -30.148,18.735 H2_TDA6.5@-29.082,19.021 -26.217,17.366 -26.189,17.373 -25.965,17.762 -25.06,18.004 -24.248,17.536 -23.835,15.991 -21.6,14.701 -21.6,10.926 -18.247,7.573 -17.455,7.573 -17.381,7.646 -17.296,7.646 v1(-17.22,7.57)
RESET#: D200.1 XMC4500.65 | length 3.4
  Top Layer w0.254: D200.1@0.55,-13.928 0.7,-13.778 XMC4500.65@0.7,-10.6
RF_TDA1: C31_TDA1.2 CON1_TDA1.1 | length 4.5
  Top Layer w0.254: C31_TDA1.2@-0.95,61.16 C31_TDA1.2@-0.95,61.43
  Top Layer w1: C31_TDA1.2@-0.95,61.43 -0.42,61.96 CON1_TDA1.1@-0.42,65.44
RF_TDA2: C31_TDA2.2 CON1_TDA2.1 | length 4.5
  Top Layer w0.254: C31_TDA2.2@51.184,33.581 C31_TDA2.2@51.418,33.716
  Top Layer w1: C31_TDA2.2@51.418,33.716 52.142,33.522 CON1_TDA2.1@55.156,35.262
RF_TDA3: C31_TDA3.2 CON1_TDA3.1 | length 4.5
  Top Layer w0.254: C31_TDA3.2@52.084,-31.919 C31_TDA3.2@52.318,-32.054
  Top Layer w1: C31_TDA3.2@52.318,-32.054 52.512,-32.778 CON1_TDA3.1@55.526,-34.518
RF_TDA4: C31_TDA4.2 CON1_TDA4.1 | length 4.5
  Top Layer w0.254: C31_TDA4.2@0.91,-61.48 C31_TDA4.2@0.91,-61.21
  Top Layer w1: CON1_TDA4.1@0.38,-65.49 0.38,-62.01 C31_TDA4.2@0.91,-61.48
RF_TDA5: C31_TDA5.2 CON1_TDA5.1 | length 4.5
  Top Layer w0.254: C31_TDA5.2@-51.418,-33.697 C31_TDA5.2@-51.184,-33.562
  Top Layer w1: CON1_TDA5.1@-55.156,-35.243 -52.142,-33.503 C31_TDA5.2@-51.418,-33.697
RF_TDA6: C31_TDA6.2 CON1_TDA6.1 | length 4.5
  Top Layer w0.254: C31_TDA6.2@-52.538,31.974 C31_TDA6.2@-52.304,31.839
  Top Layer w1: CON1_TDA6.1@-55.746,34.438 -52.732,32.698 C31_TDA6.2@-52.538,31.974
RX_TDA1_N: C28_TDA1.1 C29_TDA1.2 L1_TDA1.2 TDA5340_TDA1.22 | length 9.3
  Top Layer w0.381: C29_TDA1.2@0.08,58.04 C28_TDA1.1@0.08,57.14 0.08,56.699 L1_TDA1.2@0.08,56.04 0.08,54.898 -0.025,54.793 -0.025,54.408 -0.026,54.407 -0.026,53.223 -0.025,53.222 -0.025,51.831 1.241,50.565 TDA5340_TDA1.22@2.455,50.565
RX_TDA1_P: C27_TDA1.2 L1_TDA1.1 TDA5340_TDA1.23 | length 7.6
  Top Layer w0.381: 1.48,56.549 1.48,56.68 ; C27_TDA1.2@1.48,57.04 1.48,56.68 ; TDA5340_TDA1.23@2.455,51.215 1.49,51.215 0.61,52.095 0.61,53.485 0.609,53.486 0.609,54.144 0.61,54.145 0.61,54.529 1.48,55.399 L1_TDA1.1@1.48,56.04 1.48,56.68
RX_TDA2_N: C28_TDA2.1 C29_TDA2.2 L1_TDA2.2 TDA5340_TDA2.22 | length 9.3
  Top Layer w0.381: TDA5340_TDA2.22@43.711,25.335 43.105,26.386 43.568,28.116 44.772,28.811 44.773,28.812 45.798,29.405 45.8,29.404 46.133,29.596 46.276,29.558 L1_TDA2.2@47.265,30.129 47.837,30.459 C28_TDA2.1@48.218,30.679 C29_TDA2.2@48.997,31.129
RX_TDA2_P: C27_TDA2.2 L1_TDA2.1 TDA5340_TDA2.23 | length 7.6
  Top Layer w0.381: TDA5340_TDA2.23@44.274,25.66 43.792,26.496 44.114,27.697 45.317,28.392 45.318,28.394 45.888,28.723 45.89,28.723 46.222,28.915 47.411,28.596 L1_TDA2.1@47.965,28.917 48.52,29.237 ; 48.407,29.171 48.52,29.237 ; C27_TDA2.2@48.831,29.417 48.52,29.237
RX_TDA3_N: C28_TDA3.1 C29_TDA3.2 L1_TDA3.2 TDA5340_TDA3.22 | length 9.3
  Top Layer w0.381: TDA5340_TDA3.22@41.206,-29.57 41.813,-28.519 43.543,-28.056 44.747,-28.751 44.749,-28.75 45.774,-29.343 45.775,-29.344 46.107,-29.536 46.146,-29.68 L1_TDA3.2@47.135,-30.251 47.706,-30.581 C28_TDA3.1@48.088,-30.801 C29_TDA3.2@48.867,-31.251
RX_TDA3_P: C27_TDA3.2 L1_TDA3.1 TDA5340_TDA3.23 | length 7.6
  Top Layer w0.381: TDA5340_TDA3.23@41.769,-29.895 42.252,-29.059 43.453,-28.737 44.657,-29.432 44.659,-29.432 45.229,-29.761 45.229,-29.763 45.562,-29.955 45.88,-31.143 L1_TDA3.1@46.435,-31.463 46.99,-31.784 ; 46.876,-31.718 46.99,-31.784 ; C27_TDA3.2@47.301,-31.963 46.99,-31.784
RX_TDA4_N: C28_TDA4.1 C29_TDA4.2 L1_TDA4.2 TDA5340_TDA4.22 | length 9.3
  Top Layer w0.381: TDA5340_TDA4.22@-2.495,-50.615 -1.281,-50.615 -0.015,-51.881 -0.015,-53.272 -0.014,-53.273 -0.014,-54.457 -0.015,-54.458 -0.015,-54.843 -0.12,-54.948 L1_TDA4.2@-0.12,-56.09 -0.12,-56.749 C28_TDA4.1@-0.12,-57.19 C29_TDA4.2@-0.12,-58.09
RX_TDA4_P: C27_TDA4.2 L1_TDA4.1 TDA5340_TDA4.23 | length 7.6
  Top Layer w0.381: TDA5340_TDA4.23@-2.495,-51.265 -1.53,-51.265 -0.65,-52.145 -0.65,-53.535 -0.649,-53.536 -0.649,-54.194 -0.65,-54.195 -0.65,-54.579 -1.52,-55.449 L1_TDA4.1@-1.52,-56.09 -1.52,-56.73 ; C27_TDA4.2@-1.52,-57.09 -1.52,-56.73 ; -1.52,-56.599 -1.52,-56.73
RX_TDA5_N: C28_TDA5.1 C29_TDA5.2 L1_TDA5.2 TDA5340_TDA5.22 | length 9.3
  Top Layer w0.381: C29_TDA5.2@-48.997,-31.11 C28_TDA5.1@-48.218,-30.66 -47.836,-30.44 L1_TDA5.2@-47.265,-30.11 -46.276,-29.539 -46.132,-29.577 -45.8,-29.385 -45.798,-29.386 -44.772,-28.794 -44.772,-28.792 -43.568,-28.097 -43.104,-26.367 TDA5340_TDA5.22@-43.711,-25.316
RX_TDA5_P: C27_TDA5.2 L1_TDA5.1 TDA5340_TDA5.23 | length 7.6
  Top Layer w0.381: C27_TDA5.2@-48.831,-29.398 -48.52,-29.218 ; -48.406,-29.153 -48.52,-29.218 ; TDA5340_TDA5.23@-44.274,-25.641 -43.791,-26.477 -44.113,-27.679 -45.317,-28.374 -45.318,-28.375 -45.888,-28.704 -45.889,-28.704 -46.222,-28.896 -47.41,-28.578 L1_TDA5.1@-47.965,-28.898 -48.52,-29.218
RX_TDA6_N: C28_TDA6.1 C29_TDA6.2 L1_TDA6.2 TDA5340_TDA6.22 | length 9.3
  Top Layer w0.381: C29_TDA6.2@-49.087,31.171 C28_TDA6.1@-48.308,30.721 -47.926,30.501 L1_TDA6.2@-47.355,30.171 -46.366,29.6 -46.327,29.456 -45.995,29.264 -45.994,29.263 -44.969,28.67 -44.967,28.671 -43.763,27.976 -42.033,28.439 TDA5340_TDA6.22@-41.426,29.49
RX_TDA6_P: C27_TDA6.2 L1_TDA6.1 TDA5340_TDA6.23 | length 7.6
  Top Layer w0.381: C27_TDA6.2@-47.521,31.883 -47.21,31.704 ; -47.096,31.638 -47.21,31.704 ; TDA5340_TDA6.23@-41.989,29.815 -42.472,28.979 -43.673,28.657 -44.877,29.352 -44.879,29.352 -45.449,29.681 -45.449,29.683 -45.782,29.875 -46.1,31.063 L1_TDA6.1@-46.655,31.383 -47.21,31.704
SCK_TDA1: H1_TDA1.4 H1_TDA2.4 H1_TDA3.4 H1_TDA4.4 H1_TDA5.4 H1_TDA6.4 H2_TDA1.4 H2_TDA2.4 H2_TDA3.4 H2_TDA4.4 H2_TDA5.4 H2_TDA6.4 TDA5340_TDA1.17 TDA5340_TDA2.17 TDA5340_TDA3.17 TDA5340_TDA4.17 TDA5340_TDA5.17 TDA5340_TDA6.17 XMC4500.116 | length 348.8
  Top Layer w0.254: TDA5340_TDA5.17@-40.897,-23.691 -41.299,-22.994 -40.984,-21.82 -39.798,-21.135 -38.432,-21.501 -35.649,-19.894 -32.82,-20.652 -31.616,-22.737 H2_TDA5.4@-29.402,-23.33 -28.587,-22.86 -27.042,-23.274 -26.231,-22.806 -25.988,-21.901 -26.203,-21.529 -26.188,-21.475 H1_TDA5.4@-23.34,-19.83 -22.561,-19.83 -19.281,-23.11 -0.32,-23.11 v1(-0.08,-23.35) ; TDA5340_TDA6.17@-38.612,27.865 -38.209,28.562 -37.035,28.877 -35.849,28.192 -35.483,26.826 -32.7,25.219 -31.942,22.39 -33.145,20.305 H2_TDA6.4@-32.552,18.091 -31.737,17.621 -31.323,16.076 -30.512,15.607 -29.607,15.85 -29.393,16.221 -29.338,16.235 H1_TDA6.4@-26.49,14.591 -25.659,14.591 -23.607,16.643 -21.304,16.643 -18.949,18.998 -18.949,21.294 -18.956,21.301 -18.956,22.106 -18.103,22.96 v1(-17.77,22.96) ; v1(-17.67,25.64) -16.79,26.52 -6.578,26.52 -6.065,26.007 -6.065,23.239 -5.866,23.04 -0.674,23.04 ; TDA5340_TDA4.17@-2.495,-47.365 -3.3,-47.365 -4.159,-46.506 -4.159,-45.136 -3.159,-44.136 -3.159,-40.922 -1.088,-38.851 1.319,-38.851 H2_TDA4.4@2.94,-37.23 2.94,-36.289 4.071,-35.158 4.071,-34.222 3.408,-33.559 2.98,-33.559 2.94,-33.519 H1_TDA4.4@2.94,-30.23 ; v1(-0.9,24.32) v1@-0.69,24.32 ; v1(-0.18,-13.81) -0.18,-14.554 -0.406,-14.78 -0.406,-16.325 -1.152,-17.071 -1.822,-17.071 -2.362,-17.611 -2.362,-18.978 0.862,-22.202 2.67,-22.202 3.119,-22.651 3.119,-25.373 4.017,-26.271 4.017,-28.136 2.94,-29.213 H1_TDA4.4@2.94,-30.23 ; v1(0.47,25.71) 0.75,25.43 4.847,25.43 5.163,25.43 8.413,28.68 14.697,28.68 20.993,22.384 20.993,21.603 21.624,20.972 22.217,20.972 H1_TDA2.4@23.34,19.849 26.188,21.494 26.203,21.548 25.989,21.919 26.231,22.824 27.043,23.293 28.588,22.879 H2_TDA2.4@29.402,23.349 31.616,22.756 32.82,20.671 35.649,19.913 38.433,21.52 39.799,21.154 40.985,21.839 41.299,23.013 TDA5340_TDA2.17@40.897,23.71 ; v1(0.68,7.45) 0.703,7.473 0.703,10.597 XMC4500.116@0.7,10.6 ; XMC4500.116@0.723,10.623 0.723,11.473 0.746,11.496 0.746,12.771 0.34,13.177 -0.937,13.177 -2.75,14.99 -2.75,20.603 -1.74,21.613 -1.52,21.613 -0.674,22.459 -0.674,23.04 ; TDA5340_TDA1.17@2.455,47.315 3.26,47.315 4.119,46.456 4.119,45.086 3.119,44.086 3.119,40.872 1.048,38.801 -1.359,38.801 H2_TDA1.4@-2.98,37.18 -2.98,36.239 -4.111,35.108 -4.111,34.172 -3.448,33.509 -3.02,33.509 -2.98,33.469 H1_TDA1.4@-2.98,30.18 -2.98,29.163 -1.903,28.086 -1.903,27.553 -0.674,26.324 -0.674,23.04 ; TDA5340_TDA3.17@38.392,-27.945 37.989,-28.642 36.815,-28.957 35.629,-28.272 35.263,-26.906 32.48,-25.299 31.722,-22.47 32.925,-20.385 H2_TDA3.4@32.332,-18.171 31.517,-17.701 31.103,-16.156 30.292,-15.687 29.387,-15.93 29.173,-16.301 29.118,-16.315 H1_TDA3.4@26.27,-14.671 25.147,-13.548 25.147,-12.955 24.405,-12.213 20.394,-12.213 20.34,-12.267 20.161,-12.267 19.738,-12.69 19.738,-18.977 16.681,-22.034 16.681,-23.873 14.823,-25.731 10.053,-25.731 6.631,-29.153 5.034,-29.153 3.957,-30.23 H1_TDA4.4@2.94,-30.23
  Bottom Layer w0.254: v1(-17.77,22.96) -17.77,25.54 v1(-17.67,25.64) ; v1(-0.9,24.32) -0.92,24.32 v1(0.47,25.71) ; v1(-0.18,-13.81) 0.072,-13.81 0.73,-13.152 0.73,-10.36 0.733,-10.357 0.733,7.397 v1(0.68,7.45) ; v1(-0.08,-23.35) 0.38,-23.35 4.122,-27.092 v1(4.18,-27.092)
SELECT1: H1_TDA1.1 H2_TDA1.1 TDA5340_TDA1.16 XMC4500.105 | length 60.9
  Top Layer w0.254: H1_TDA1.1@-5.52,27.64 -5.52,23.86 v1(-5.38,23.72) ; H2_TDA1.1@-5.52,34.64 -5.52,35.581 -4.389,36.712 -4.389,38.309 -3.389,39.309 0.838,39.309 2.611,41.082 2.611,44.297 3.611,45.297 3.611,46.245 3.191,46.665 TDA5340_TDA1.16@2.455,46.665 ; v1@5.46,17.288 5.927,16.821 5.927,12.987 5.93,12.984 5.93,10.98 4.444,9.494 4.444,7.789 4.96,7.273 XMC4500.105@6.073,7.273
  Bottom Layer w0.254: H1_TDA1.1@-5.52,27.64 -4.389,28.771 -4.389,30.648 -5.052,31.311 -5.52,31.311 H2_TDA1.1@-5.52,34.64 ; v1(-5.38,23.72) -5.48,23.62 -5.48,18.047 -4.316,16.883 4.683,16.883 5.044,17.244 v1(5.504,17.244)
SELECT2: H1_TDA2.1 H2_TDA2.1 TDA5340_TDA2.16 XMC4500.114 | length 66.3
  Top Layer w0.254: XMC4500.114@1.7,10.6 1.7,13.132 2.46,13.892 v1(2.46,14.83) ; H2_TDA2.1@25.932,24.279 26.747,24.749 28.292,24.335 29.675,25.134 31.041,24.768 33.155,21.107 35.577,20.458 38.361,22.065 39.727,21.699 40.548,22.174 40.702,22.747 TDA5340_TDA2.16@40.334,23.385
  Bottom Layer w0.254: v1(2.46,14.83) 2.46,15.64 3.13,16.31 5.528,16.31 6.181,16.963 6.181,28.838 6.669,29.326 9.892,29.326 17.542,21.676 18.973,21.676 H1_TDA2.1@19.87,20.779 21.415,20.365 23.041,21.304 23.284,22.209 23.049,22.614 H2_TDA2.1@25.932,24.279
SELECT3: H1_TDA3.1 H2_TDA3.1 TDA5340_TDA3.16 XMC4500.118 | length 77.9
  Top Layer w0.254: XMC4500.118@-0.3,10.6 -0.3,9.08 v1(0.02,8.76) ; H2_TDA3.1@31.402,-14.701 32.217,-15.171 32.631,-16.716 34.014,-17.515 34.38,-18.881 32.267,-22.542 32.916,-24.964 35.7,-26.571 36.066,-27.937 36.887,-28.412 37.46,-28.258 TDA5340_TDA3.16@37.829,-27.62
  Bottom Layer w0.254: v1(0.02,8.76) 0.157,8.897 1.66,8.897 2.057,8.5 2.057,7.87 1.187,6.999 1.187,-9.69 3.217,-11.72 6.523,-11.72 7.52,-10.723 8.727,-10.723 10.768,-8.682 13.901,-8.682 14.35,-8.233 14.91,-8.233 15.813,-9.136 18.501,-9.136 19.824,-10.459 20.528,-10.459 21.271,-11.201 H1_TDA3.1@25.34,-11.201 25.754,-12.746 27.38,-13.685 28.285,-13.442 28.519,-13.037 H2_TDA3.1@31.402,-14.701
SELECT4: H1_TDA4.1 H2_TDA4.1 TDA5340_TDA4.16 XMC4500.119 | length 72.9
  Top Layer w0.254: v1(-3.27,-15.63) -3.82,-16.18 -3.82,-20.162 -2.892,-21.09 ; TDA5340_TDA4.16@-2.495,-46.715 -3.231,-46.715 -3.651,-46.295 -3.651,-45.347 -2.651,-44.347 -2.651,-41.132 -0.878,-39.359 3.349,-39.359 4.349,-38.359 4.349,-36.762 5.48,-35.631 H2_TDA4.1@5.48,-34.69 ; XMC4500.119@-0.8,10.6 -0.8,8.239 v1(-0.623,8.062)
  Bottom Layer w0.254: v1(-3.27,-15.63) -3.21,-15.63 -2.751,-15.171 -2.751,-14.139 -0.769,-12.157 -0.769,5.911 -1.137,6.28 -1.137,7.213 -0.623,7.727 v1(-0.623,8.062) ; v1(-2.54,-21.09) -0.957,-22.673 0.345,-22.673 1.699,-24.027 2.015,-24.027 4.403,-26.415 4.857,-26.415 4.857,-27.067 H1_TDA4.1@5.48,-27.69 ; H2_TDA4.1@5.48,-34.69 5.48,-31.361 5.012,-31.361 4.349,-30.698 4.349,-28.821 H1_TDA4.1@5.48,-27.69 ; H1_TDA4.1@5.48,-27.114 H1_TDA4.1@5.48,-27.69
SELECT5: H1_TDA5.1 H2_TDA5.1 TDA5340_TDA5.16 XMC4500.120 | length 81.9
  Top Layer w0.254: TDA5340_TDA5.16@-40.334,-23.366 -40.702,-22.728 -40.548,-22.155 -39.727,-21.681 -38.361,-22.047 -35.577,-20.439 -33.155,-21.088 -31.041,-24.749 -29.675,-25.115 -28.292,-24.316 -26.747,-24.73 H2_TDA5.1@-25.932,-24.26 ; v1(-16.68,-21.76) -16.24,-22.2 -2.1,-22.2 -1.863,-21.963 -1.863,-20.81 -2.27,-20.403 -2.937,-20.403 -3.27,-20.07 -3.27,-16.66 -2.578,-15.968 -2.578,-16.228 v1(-2.61,-16.26) ; XMC4500.120@-1.3,10.6 -1.3,7.69 -0.46,6.85 v1(-0.46,6.56)
  Bottom Layer w0.254: H2_TDA5.1@-25.932,-24.26 -23.049,-22.595 -23.283,-22.19 -23.041,-21.285 -21.415,-20.346 H1_TDA5.1@-19.87,-20.76 -17.68,-20.76 v1(-16.68,-21.76) ; v1(-2.61,-16.26) -2.57,-16.26 -2.297,-15.987 -2.297,-14.327 -0.315,-12.345 -0.315,6.415 v1(-0.46,6.56)
SELECT6: H1_TDA6.1 H2_TDA6.1 TDA5340_TDA6.16 XMC4500.121 | length 56.4
  Top Layer w0.254: TDA5340_TDA6.16@-38.049,27.54 -37.68,28.178 -37.107,28.332 -36.286,27.857 -35.92,26.491 -33.136,24.884 -32.487,22.462 -34.6,18.801 -34.234,17.435 -32.851,16.636 -32.437,15.091 H2_TDA6.1@-31.622,14.621 ; v1(-9.97,6.27) -9.7,6 -5.18,6 -1.823,9.357 -1.823,10.577 XMC4500.121@-1.8,10.6
  Bottom Layer w0.254: H2_TDA6.1@-31.622,14.621 -28.739,12.957 -28.505,13.362 -27.6,13.605 -25.974,12.666 H1_TDA6.1@-25.56,11.121 -25.535,11.096 -23.054,11.096 -18.607,6.649 -18.607,6.217 -18.36,5.97 -17.61,5.97 -17.31,6.27 v1(-9.97,6.27)
STATUSLED1: D4.2 XMC4500.101 | length 24.7
  Top Layer w0.254: XMC4500.101@6.05,5.25 6.073,5.273 6.923,5.273 7.202,5.552 7.202,12.996 6.835,13.363 6.835,16.935 v1(7.11,17.21) ; v1(9.84,26.38) D4.2@11.07,26.38
  Bottom Layer w0.254: v1(7.11,17.21) 7.11,23.65 v1(9.84,26.38)
STATUSLED2: D5.2 XMC4500.100 | length 23.5
  Top Layer w0.254: XMC4500.100@6.05,4.75 6.073,4.773 7.065,4.773 7.796,5.504 7.796,13.045 7.289,13.552 7.289,16.089 v1(7.55,16.35) ; v1(9.82,24.4) 11.04,24.4 D5.2@11.06,24.42
  Bottom Layer w0.254: v1(7.55,16.35) 7.797,16.597 7.797,22.377 v1(9.82,24.4)
STATUSLED3: D6.2 XMC4500.99 | length 22.1
  Top Layer w0.254: XMC4500.99@6.05,4.25 7.184,4.25 8.25,5.316 8.25,13.233 7.743,13.74 7.743,15.12 8.27,15.647 v1(8.27,15.78) ; v1(9.8,22.44) D6.2@11.05,22.44
  Bottom Layer w0.254: v1(8.27,15.78) 8.27,20.91 v1(9.8,22.44)
STATUSLED4: D7.2 XMC4500.98 | length 20.5
  Top Layer w0.254: XMC4500.98@6.05,3.75 6.073,3.773 7.349,3.773 8.78,5.204 8.78,13.66 8.43,14.01 v1(8.43,14.85) ; v1(9.86,20.39) 10.96,20.39 D7.2@11.04,20.47
  Bottom Layer w0.254: v1(8.43,14.85) 9.097,15.517 9.097,19.627 v1(9.86,20.39)
STATUSLED5: D8.2 XMC4500.97 | length 25.2
  Top Layer w0.254: v1(4.32,3.58) 4.65,3.25 XMC4500.97@6.05,3.25 ; D8.2@11.13,18.42 v1(12.02,18.42) ; v1(11.758,7.745) 11.673,7.66 11.673,11.551 14.69,14.568 v1(14.69,14.85)
  Bottom Layer w0.254: v1(4.32,3.58) 6.831,3.58 10.996,7.745 v1(11.758,7.745) ; v1(12.02,18.42) 14.51,15.93 14.69,15.75 v1(14.69,14.85)
STATUSLED6: D9.2 XMC4500.96 | length 22.8
  Top Layer w0.254: v1(3.5,2.96) 3.5,2.76 3.51,2.75 XMC4500.96@6.05,2.75 ; D9.2@11.06,16.57 11.937,15.693 11.937,13.915 11.081,13.059 11.081,7.149 v1(11.31,6.92)
  Bottom Layer w0.254: v1(3.5,2.96) 3.65,2.81 6.703,2.81 10.813,6.92 v1(11.31,6.92)
STATUSLED7: D10.2 XMC4500.95 | length 20.1
  Top Layer w0.254: v1(3.73,2.05) 4.17,2.05 4.37,2.25 XMC4500.95@6.05,2.25 ; v1(10.86,5.95) 10.627,6.183 10.627,14.217 D10.2@11.06,14.65
  Bottom Layer w0.254: v1(3.73,2.05) 3.911,2.231 6.766,2.231 ; 6.785,2.25 10.485,5.95 v1(10.86,5.95)
TCK: JTAG.3 XMC4500.93 | length 31.1
  Top Layer w0.254: JTAG.3@1.21,20.5 2.287,19.423 6.719,19.423 9.719,16.423 9.719,3.269 v1(8.75,2.3) v1@8.85,2.2 ; v1(4.7,1.1) 4.85,1.25 XMC4500.93@6.05,1.25
  Bottom Layer w0.254: v1(4.7,1.1) 4.7,1.05 7.8,1.05 8.75,2 v1(8.75,2.3)
TMS: JTAG.1 XMC4500.92 | length 26.9
  Top Layer w0.254: JTAG.1@3.75,20.5 5.461,20.5 6.084,19.877 6.907,19.877 10.173,16.611 10.173,2.766 9.03,1.623 7.861,1.623 7.173,0.935 7.173,0.806 7.117,0.75 XMC4500.92@6.05,0.75
"VDD (3,3V)": C5.2 C6.2 C7.2 C8.2 C101.2 C200.2 C209.2 D201.1 H1_TDA1.2 H1_TDA2.2 H1_TDA3.2 H1_TDA4.2 H1_TDA5.2 H1_TDA6.2 H2_TDA1.2 H2_TDA2.2 H2_TDA3.2 H2_TDA4.2 H2_TDA5.2 H2_TDA6.2 IC3.14 JTAG.2 L2_TDA1.2 L2_TDA2.2 L2_TDA3.2 L2_TDA4.2 L2_TDA5.2 L2_TDA6.2 L200.2 R1_TDA1.2 R1_TDA2.2 R1_TDA3.2 R1_TDA4.2 R1_TDA5.2 R1_TDA6.2 R2_TDA1.2 R2_TDA2.2 R2_TDA3.2 R2_TDA4.2 R2_TDA5.2 R2_TDA6.2 R3_TDA1.2 R3_TDA2.2 R3_TDA3.2 R3_TDA4.2 R3_TDA5.2 R3_TDA6.2 R11.2 R20.2 R21.2 R22.2 R23.2 R24.2 R25.2 R26.2 R200.2 R201.2 R202.2 R203.2 R204.2 TDA5340_TDA1.6 TDA5340_TDA2.6 TDA5340_TDA3.6 TDA5340_TDA4.6 TDA5340_TDA5.6 TDA5340_TDA6.6 U1.2 U1.4 XMC4500.18 XMC4500.24 XMC4500.46 XMC4500.48 XMC4500.62 XMC4500.86 XMC4500.126 | length 624.9
  Top Layer w0.254: v1(-48.49,-25.148) R3_TDA5.2@-48.179,-24.968 ; R2_TDA6.2@-47.467,23.077 -46.645,22.602 -46.064,22.757 ; R1_TDA6.2@-46.047,21.737 -45.955,21.395 -45.513,21.14 -45.428,20.824 -44.549,20.316 -43.839,20.507 -43.831,20.48 -43.307,20.177 -42.722,20.334 -42.709,20.356 -42.542,20.4 -40.038,18.955 -39.416,19.121 H2_TDA6.2@-33.822,15.891 -33.059,15.451 -32.866,14.729 -33.056,14.4 -32.974,14.096 -31.401,13.188 -31.097,13.269 -30.643,14.056 H1_TDA6.2@-27.76,12.391 -27.009,12.391 -24.97,14.43 -22.45,14.43 -18.98,17.9 C101.2@-17,17.9 ; R1_TDA6.2@-45.872,22.04 -46.064,22.757 ; TDA5340_TDA6.6@-44.864,24.836 -46.064,22.757 ; v1(-43.67,33.713) R3_TDA6.2@-43.359,33.533 ; TDA5340_TDA5.6@-41.399,-30.621 -40.199,-32.699 ; R2_TDA5.2@-41.177,-33.755 -40.355,-33.28 -40.199,-32.699 ; R1_TDA5.2@-39.482,-32.891 -40.199,-32.699 ; R1_TDA5.2@-39.307,-33.194 -38.965,-33.286 -38.523,-33.03 -38.207,-33.115 -37.328,-32.607 -37.137,-31.897 -37.11,-31.904 -36.586,-31.601 -36.429,-31.017 -36.442,-30.995 -36.397,-30.827 -33.893,-29.382 -33.726,-28.76 H2_TDA5.2@-28.132,-25.53 -27.369,-25.089 -26.648,-25.283 -26.458,-25.612 -26.153,-25.693 -24.58,-24.786 -24.499,-24.481 -24.953,-23.694 H1_TDA5.2@-22.07,-22.03 ; C5.2@-17.3,-0.691 -17.3,0.14 -17.19,0.25 XMC4500.18@-15.15,0.25 ; XMC4500.24@-15.15,-2.75 -15.127,-2.727 -14.277,-2.727 -13.56,-2.01 -13.56,0.123 ; XMC4500.18@-15.127,0.273 -13.71,0.273 -13.56,0.123 ; XMC4500.46@-8.8,-10.6 -8.8,-11.7 -8.6,-11.9 -7.8,-11.9 ; v1(-8.2,19) U1.4@-8.2,19.15 ; v1(-8.14,23.25) R11.2@-7.75,23.25 -8.2,22.8 U1.4@-8.2,19.15 ; XMC4500.48@-7.8,-10.6 -7.8,-11.9 ; v1(-6.63,-8.97) -1.84,-8.97 -1.71,-8.84 ; R1_TDA1.2@-6.57,50.69 -6.82,50.44 -6.82,49.929 -7.051,49.698 -7.051,48.682 -6.531,48.162 -6.551,48.143 -6.551,47.537 -6.123,47.109 -6.097,47.109 -5.975,46.987 -5.975,44.095 -5.52,43.64 H2_TDA1.2@-5.52,37.18 -5.52,36.299 -6.048,35.771 -6.428,35.771 -6.651,35.548 -6.651,33.732 -6.428,33.509 -5.52,33.509 H1_TDA1.2@-5.52,30.18 ; v1(-6.55,-12.38) -7.32,-12.38 -7.8,-11.9 ; R1_TDA1.2@-6.22,50.69 -5.695,51.215 ; R2_TDA1.2@-6.12,52.59 -6.12,51.64 -5.695,51.215 ; -5.836,4.636 -11.573,4.636 -12.603,3.606 -12.603,0.52 -13,0.123 -13.56,0.123 ; v1(-5.5,12.11) -5.5,12.5 -5.127,12.873 ; v1(-5.03,-54.67) R3_TDA4.2@-5.03,-54.31 ; XMC4500.126@-4.3,10.6 -4.323,10.623 -4.323,11.473 -4.55,11.7 C8.2@-4.55,12.5 -4.65,12.6 -4.65,12.873 -5.127,12.873 ; TDA5340_TDA1.6@-3.295,51.215 -5.695,51.215 ; C6.2@-2.4,-12.85 -1.983,-12.85 -0.8,-11.667 XMC4500.62@-0.8,-10.6 -0.823,-10.577 -0.823,-9.727 -1.71,-8.84 ; v1(2.32,-8.87) 2.29,-8.84 -1.71,-8.84 ; TDA5340_TDA4.6@3.255,-51.265 5.655,-51.265 ; JTAG.2@3.75,17.96 4.008,17.702 JTAG.2@4.373,17.702 ; R202.2@4.4,-20.4 5.172,-21.172 D201.1@6,-21.172 6.472,-21.172 6.55,-21.094 7.15,-21.694 C209.2@7.15,-22.55 6.3,-23.4 6.3,-25.35 6.827,-25.877 8.623,-25.877 L200.2@9.75,-24.75 ; v1(4.708,-2.073) 4.885,-2.25 XMC4500.86@6.05,-2.25 C7.2@7.35,-2.25 ; R3_TDA1.2@4.99,54.26 v1(4.99,54.62) ; H1_TDA4.2@5.48,-30.23 5.48,-33.559 6.388,-33.559 6.611,-33.782 6.611,-35.598 6.388,-35.821 6.008,-35.821 5.48,-36.349 5.48,-43.69 5.935,-44.145 5.935,-47.037 6.057,-47.159 6.083,-47.159 6.511,-47.587 6.511,-48.193 6.491,-48.212 7.011,-48.732 7.011,-49.748 6.78,-49.979 6.78,-50.49 R1_TDA4.2@6.53,-50.74 ; v1(5.504,23.845) 8.977,27.318 14.016,27.318 16.2,25.134 R20.2@16.2,24.63 ; v1(5.86,-11.04) 5.82,-11.08 5.82,-11.97 R203.2@6.1,-12.25 8.79,-12.25 9.137,-12.597 9.137,-13.813 ; R2_TDA4.2@6.08,-52.64 6.08,-51.69 5.655,-51.265 ; R1_TDA4.2@6.18,-50.74 5.655,-51.265 ; v1(7.38,-26.66) 7.38,-25.947 ; C7.2@7.5,-2.4 7.73,-2.4 v1(7.73,-2.43) ; IC3.14@9.1,-14.75 9.1,-13.85 9.137,-13.813 ; v1(9.82,-13.47) 9.48,-13.47 9.137,-13.813 ; v1(12.81,-12.36) 12.81,-11.44 R204.2@12.85,-11.4 ; R24.2@16.23,18.51 R23.2@16.23,20.49 R20.2@16.23,24.6 ; R26.2@16.25,15.98 R25.2@16.25,17.26 ; R24.2@16.25,18.49 R25.2@16.25,17.26 ; R200.2@21.93,9.99 R201.2@20.76,9.99 20.76,14.46 17.96,17.26 R25.2@16.25,17.26 ; H1_TDA2.2@22.07,22.049 24.953,23.713 24.499,24.5 24.581,24.804 26.153,25.712 26.458,25.631 26.648,25.302 27.369,25.108 H2_TDA2.2@28.132,25.549 33.727,28.779 33.893,29.4 36.397,30.846 36.442,31.013 36.429,31.035 36.586,31.62 37.111,31.923 37.138,31.916 37.328,32.626 38.207,33.134 38.523,33.049 38.966,33.305 R1_TDA2.2@39.307,33.213 ; H1_TDA3.2@27.54,-12.471 30.423,-14.136 30.877,-13.349 31.181,-13.268 32.754,-14.176 32.836,-14.48 32.646,-14.809 32.839,-15.531 H2_TDA3.2@33.602,-15.971 39.196,-19.201 39.818,-19.035 42.322,-20.48 42.489,-20.436 42.502,-20.414 43.087,-20.257 43.611,-20.56 43.619,-20.587 44.329,-20.396 45.208,-20.904 45.293,-21.22 45.735,-21.475 R1_TDA3.2@45.827,-21.817 ; R1_TDA2.2@39.482,32.91 40.199,32.718 ; R2_TDA2.2@41.178,33.773 40.355,33.298 40.199,32.718 ; TDA5340_TDA2.6@41.399,30.639 40.199,32.718 ; R3_TDA3.2@43.139,-33.613 v1(43.45,-33.793) ; TDA5340_TDA3.6@44.644,-24.916 45.844,-22.837 ; R1_TDA3.2@45.652,-22.12 45.844,-22.837 ; R2_TDA3.2@47.247,-23.157 46.425,-22.682 45.844,-22.837 ; R3_TDA2.2@48.179,24.987 v1(48.491,25.167) ; U1.4@-8.2,19.15 -8.15,19.2 -4.7,19.2 v1(-4.65,19.25) -4.65,18.703 -5.127,18.226 -5.127,12.873
  Top Layer w0.4: C101.2@-17,17.9 -15.9,17.9 U1.2@-14.8,19 v1(-8.2,19)
  Bottom Layer w0.254: v1(-52.49,-30.24) -53.08,-29.218 -52.63,-27.538 v1(-48.49,-25.148) -47.444,-24.544 -47.177,-23.546 -46.281,-23.029 -45.696,-23.185 -40.524,-32.145 -40.656,-32.638 v1(-40.083,-33.631) ; v1(-50.08,34.631) -49.49,35.653 -47.81,36.103 v1(-43.67,33.713) -42.624,33.109 -41.626,33.377 -40.73,32.86 -40.574,32.275 -45.746,23.315 -46.24,23.183 v1(-46.813,22.191) ; H1_TDA5.2@-22.07,-22.03 -22.07,-22.112 -19.972,-22.112 -17.617,-24.467 -11.273,-24.467 -6.319,-19.513 v1@-6.319,-12.39 ; v1@-7.916,23.354 -7.916,24.71 -6.597,26.029 -6.597,29.103 H1_TDA1.2@-5.52,30.18 ; v1(-6.63,-8.97) -6.319,-9.281 v1@-6.319,-12.39 ; v1(-6.56,51.58) -5.414,51.58 -5.053,51.219 5.293,51.219 5.721,51.647 5.721,52.681 4.99,53.412 v1(4.99,54.62) 4.99,59.4 3.76,60.63 v1(2.58,60.63) ; v1(-6.55,-12.38) -6.329,-12.38 v1@-6.319,-12.39 ; v1(-5.58,4.38) -5.58,7.83 ; v1(-5.5,12.11) -5.58,12.19 -5.58,7.83 ; v1(-2.62,-60.68) -3.8,-60.68 -5.03,-59.45 v1(-5.03,-54.67) -5.03,-53.462 -5.761,-52.731 -5.761,-51.697 -5.333,-51.269 5.013,-51.269 5.374,-51.63 v1(6.52,-51.63) ; JTAG.2@3.75,17.96 2.84,17.96 1.55,19.25 v1(-4.65,19.25) -4.65,19.46 -4.947,19.757 -4.947,20.946 -2.734,23.159 4.667,23.159 5.717,24.209 5.717,29.016 6.481,29.78 10.08,29.78 17.73,22.13 22.07,22.13 H1_TDA2.2@22.07,22.049 ; v1(4.708,-2.073) 4.85,-2.215 2.35,-2.215 2.095,-2.47 ; H1_TDA4.2@5.48,-30.23 7.31,-28.4 7.31,-26.73 v1(7.38,-26.66) 7.856,-26.184 8.828,-26.184 10.294,-24.718 10.294,-20.544 8.663,-18.912 8.663,-15.349 9.986,-14.026 10.376,-14.026 v1(9.82,-13.47) ; v1(5.86,-11.04) 5.627,-10.807 5.627,-10.54 5.23,-10.143 3.503,-10.143 2.32,-8.96 v1(2.32,-8.87) 2.095,-8.645 2.095,-2.47 ; v1(7.73,-2.43) 7.74,-2.42 7.866,-2.546 9.053,-2.546 14.286,-7.779 15.169,-7.779 16.072,-8.682 19.394,-8.682 20.412,-9.7 25.6,-9.7 27.54,-11.639 H1_TDA3.2@27.54,-12.471 ; 10.424,-14.026 12.09,-12.36 v1(12.81,-12.36) ; v1(40.083,33.649) 40.656,32.657 40.524,32.164 45.697,23.204 46.282,23.047 47.177,23.564 47.444,24.563 v1(48.491,25.167) 52.63,27.557 53.08,29.237 v1(52.49,30.259) ; v1(46.593,-22.271) 46.02,-23.263 45.526,-23.395 40.354,-32.355 40.51,-32.94 41.406,-33.457 42.404,-33.189 v1(43.45,-33.793) 47.59,-36.183 49.27,-35.733 v1(49.86,-34.711) ; -5.58,7.83 -3.973,9.437 1.762,9.437 2.627,8.572 2.627,4.76 2.095,4.227 2.095,-2.47
  other v1: -18.2,14.6 -18.2,15.5 -5.3,15.7 -4.3,15.7 -10.7,16.3 -9.7,16.3 -18.2,16.4 -5.3,16.6 -10.7,17.2 -9.7,17.2 -10.7,18.1 -9.7,18.1 -8.2,18.1 -10.7,19 -9.7,19 -10.7,19.9 -9.7,19.9 -8.2,20 -10.7,20.8 -9.7,20.8 -10.7,21.7 -9.7,21.7 -16.2,22.8 -15.4,22.8 -16.2,23.6 -15.4,23.6 -14.7,27.3 -13.7,27.3 -12.7,27.3 -11.7,27.3 -10.7,27.3 -9.7,27.3 -8.7,27.3 -7.7,27.3 -14.7,28.3 -13.7,28.3 -12.7,28.3 -11.7,28.3 -10.7,28.3 -9.7,28.3 -8.7,28.3 -7.7,28.3
pads on no net: F1_TDA1.1@-1.72,55.04 F1_TDA1.3 F1_TDA1.4 F1_TDA2.1@45.499,31.188 F1_TDA2.3 F1_TDA2.4 F1_TDA3.1@47.169,-28.192 F1_TDA3.3 F1_TDA3.4 F1_TDA4.1@1.68,-55.09 F1_TDA4.3 F1_TDA4.4 F1_TDA5.1@-45.499,-31.169 F1_TDA5.3 F1_TDA5.4 F1_TDA6.1@-47.389,28.112 F1_TDA6.3 F1_TDA6.4 J1.4 J1.SH JTAG.5 JTAG.7 JTAG.8 T1. T1.7 TDA5340_TDA1.1 TDA5340_TDA1.26 TDA5340_TDA2.1 TDA5340_TDA2.26 TDA5340_TDA3.1 TDA5340_TDA3.26 TDA5340_TDA4.1 TDA5340_TDA4.26 TDA5340_TDA5.1 TDA5340_TDA5.26 TDA5340_TDA6.1 TDA5340_TDA6.26 XMC4500.7 XMC4500.8 XMC4500.9 XMC4500.10 XMC4500.13 XMC4500.20 XMC4500.21 XMC4500.25 XMC4500.26 XMC4500.27 XMC4500.28 XMC4500.29 XMC4500.30 XMC4500.31 XMC4500.32 XMC4500.33 XMC4500.34 XMC4500.35 XMC4500.36 XMC4500.37 XMC4500.38 XMC4500.39 XMC4500.40 XMC4500.41 XMC4500.42 XMC4500.43 XMC4500.44 XMC4500.49 XMC4500.50 XMC4500.51 XMC4500.52 XMC4500.55 XMC4500.56 XMC4500.57 XMC4500.58 XMC4500.59 XMC4500.60 XMC4500.63 XMC4500.64 XMC4500.81 XMC4500.84 XMC4500.94 XMC4500.102 XMC4500.103 XMC4500.104 XMC4500.106 XMC4500.108 XMC4500.109 XMC4500.117 XMC4500.122 XMC4500.123 XMC4500.124 XMC4500.127 XMC4500.128 XMC4500.129 XMC4500.130 XMC4500.131 XMC4500.132 XMC4500.133 XMC4500.134 XMC4500.135 XMC4500.136 XMC4500.137 XMC4500.138 XMC4500.139 XMC4500.140

## Polygon pours and split planes (outlines as drawn)
GND on Top Layer "Top Layer- GND" (solid, pour order 42): -7.82,38.14 7.68,38.14 7.68,68.14 -7.82,68.14
GND on Top Layer "Top Layer- GND" (solid, pour order 41): 27.814,28.021 35.564,14.597 61.544,29.597 53.794,43.021
GND on Top Layer "Top Layer- GND" (solid, pour order 40): 35.583,-14.459 27.833,-27.883 53.814,-42.883 61.564,-29.459
GND on Top Layer "Top Layer- GND" (solid, pour order 39): 7.78,-38.19 -7.72,-38.19 -7.72,-68.19 7.78,-68.19
GND on Top Layer "Top Layer- GND" (solid, pour order 38): -27.813,-28.002 -35.563,-14.578 -61.544,-29.578 -53.794,-43.002
GND on Top Layer "Top Layer- GND" (solid, pour order 37): -35.803,14.379 -28.053,27.803 -54.034,42.803 -61.784,29.379
"VDD (3,3V)" on Top Layer "VDD_(3,3V)_L01_P054" (solid, pour order 54): -19.16,13.27 -19.16,26.56 -10.99,31.29 -1.71,31.29 -1.71,14.87 -1.71,13.25 -19.16,13.25
GND on Top Layer "GND_L01_P058" (solid, pour order 58): -30.63,9.68 -21.72,25.11 -19.16,26.56 -19.16,13.25 -1.71,13.25 -1.71,31.29 10.97,31.3 21.72,25.11 31.08,8.91 35.27,8.91 35.27,-9.16 30.67,-9.16 21.35,-25.32 10.97,-31.3 -10.97,-31.3 -21.35,-25.31 -30.62,-9.26
GND on Bottom Layer "Bottom Layer- GND" (solid, pour order 48): -7.82,38.14 7.68,38.14 7.68,68.14 -7.82,68.14
GND on Bottom Layer "Bottom Layer- GND" (solid, pour order 47): 27.814,28.021 35.564,14.597 61.544,29.597 53.794,43.021
GND on Bottom Layer "Bottom Layer- GND" (solid, pour order 46): 35.583,-14.459 27.833,-27.883 53.814,-42.883 61.564,-29.459
GND on Bottom Layer "Bottom Layer- GND" (solid, pour order 45): 7.78,-38.19 -7.72,-38.19 -7.72,-68.19 7.78,-68.19
GND on Bottom Layer "Bottom Layer- GND" (solid, pour order 44): -27.813,-28.002 -35.563,-14.578 -61.544,-29.578 -53.794,-43.002